# Altium PCB PCB2.PcbDoc
Units mil, origin at the board's own origin, x right, y up, seen from the top; angles counter-clockwise.
Board outline 5780 x 3960 mil, 2 copper layers (Top Layer, Bottom Layer); 50 components, 61 nets, 281 pads, 48 vias.
Unrouted connection lines stored in the file: 8.
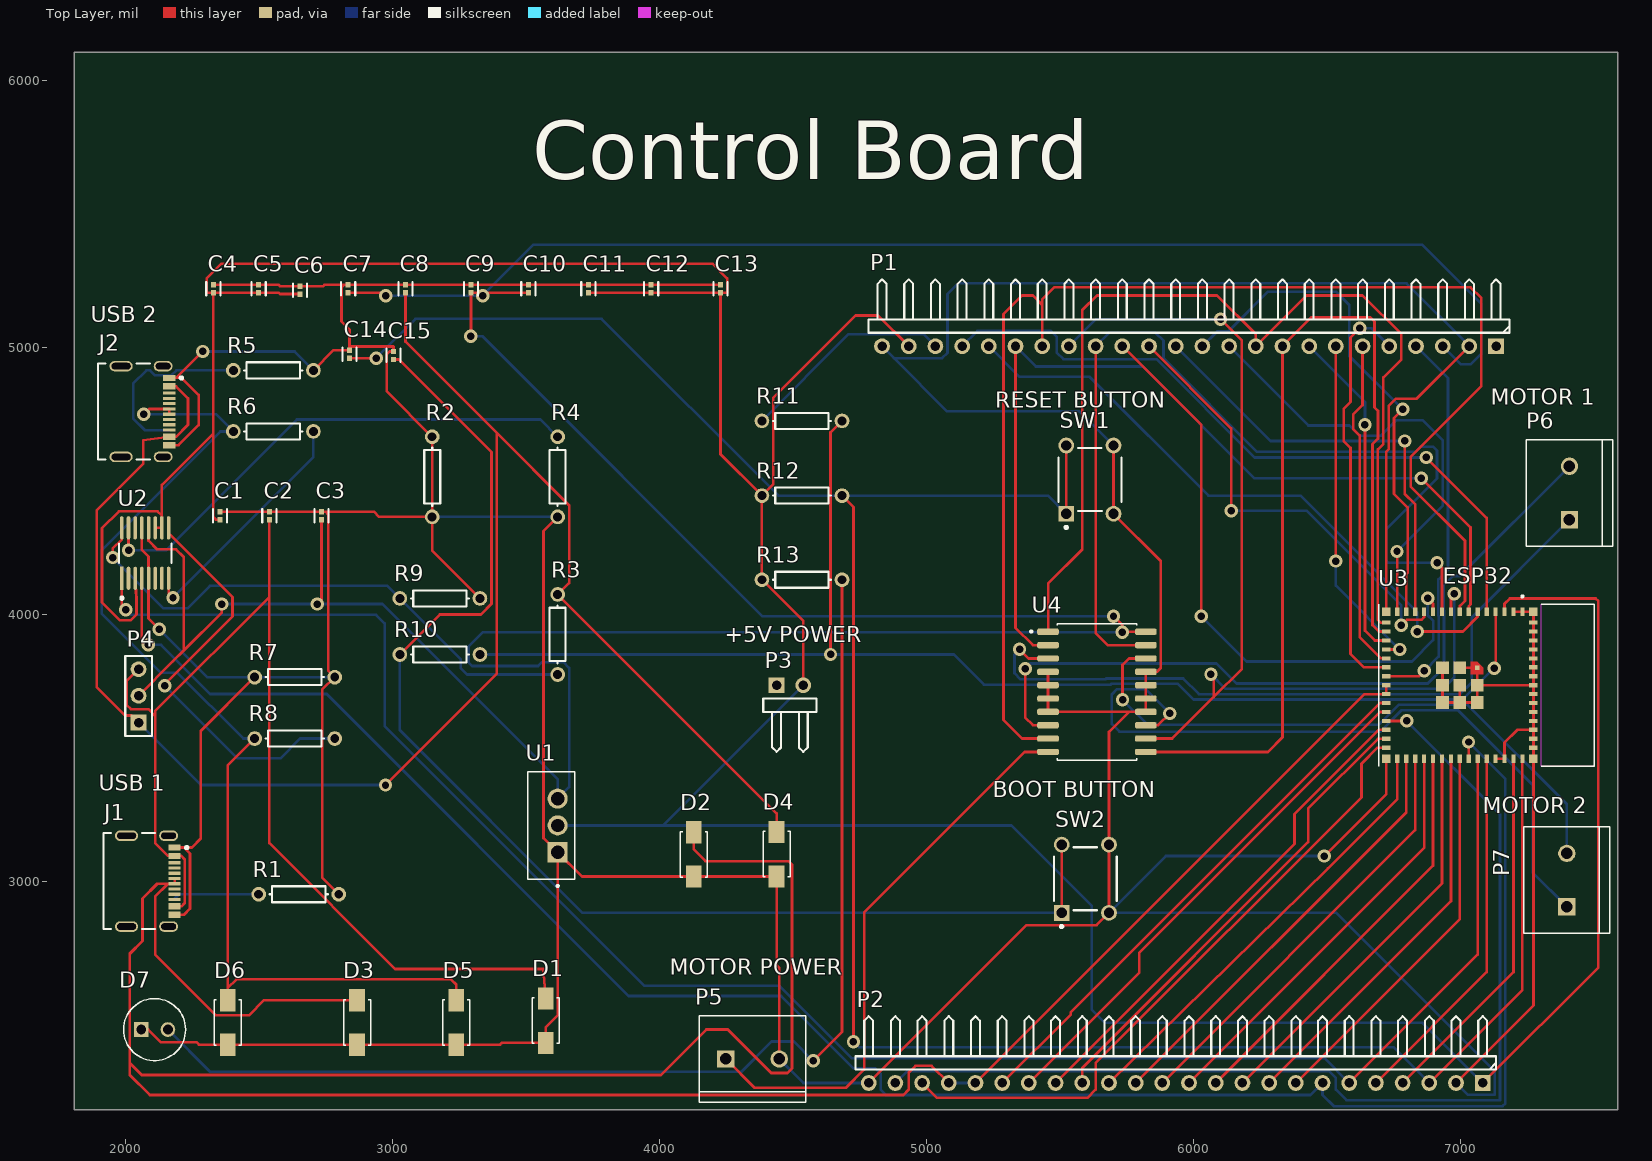
[diagram p0: Top Layer view]
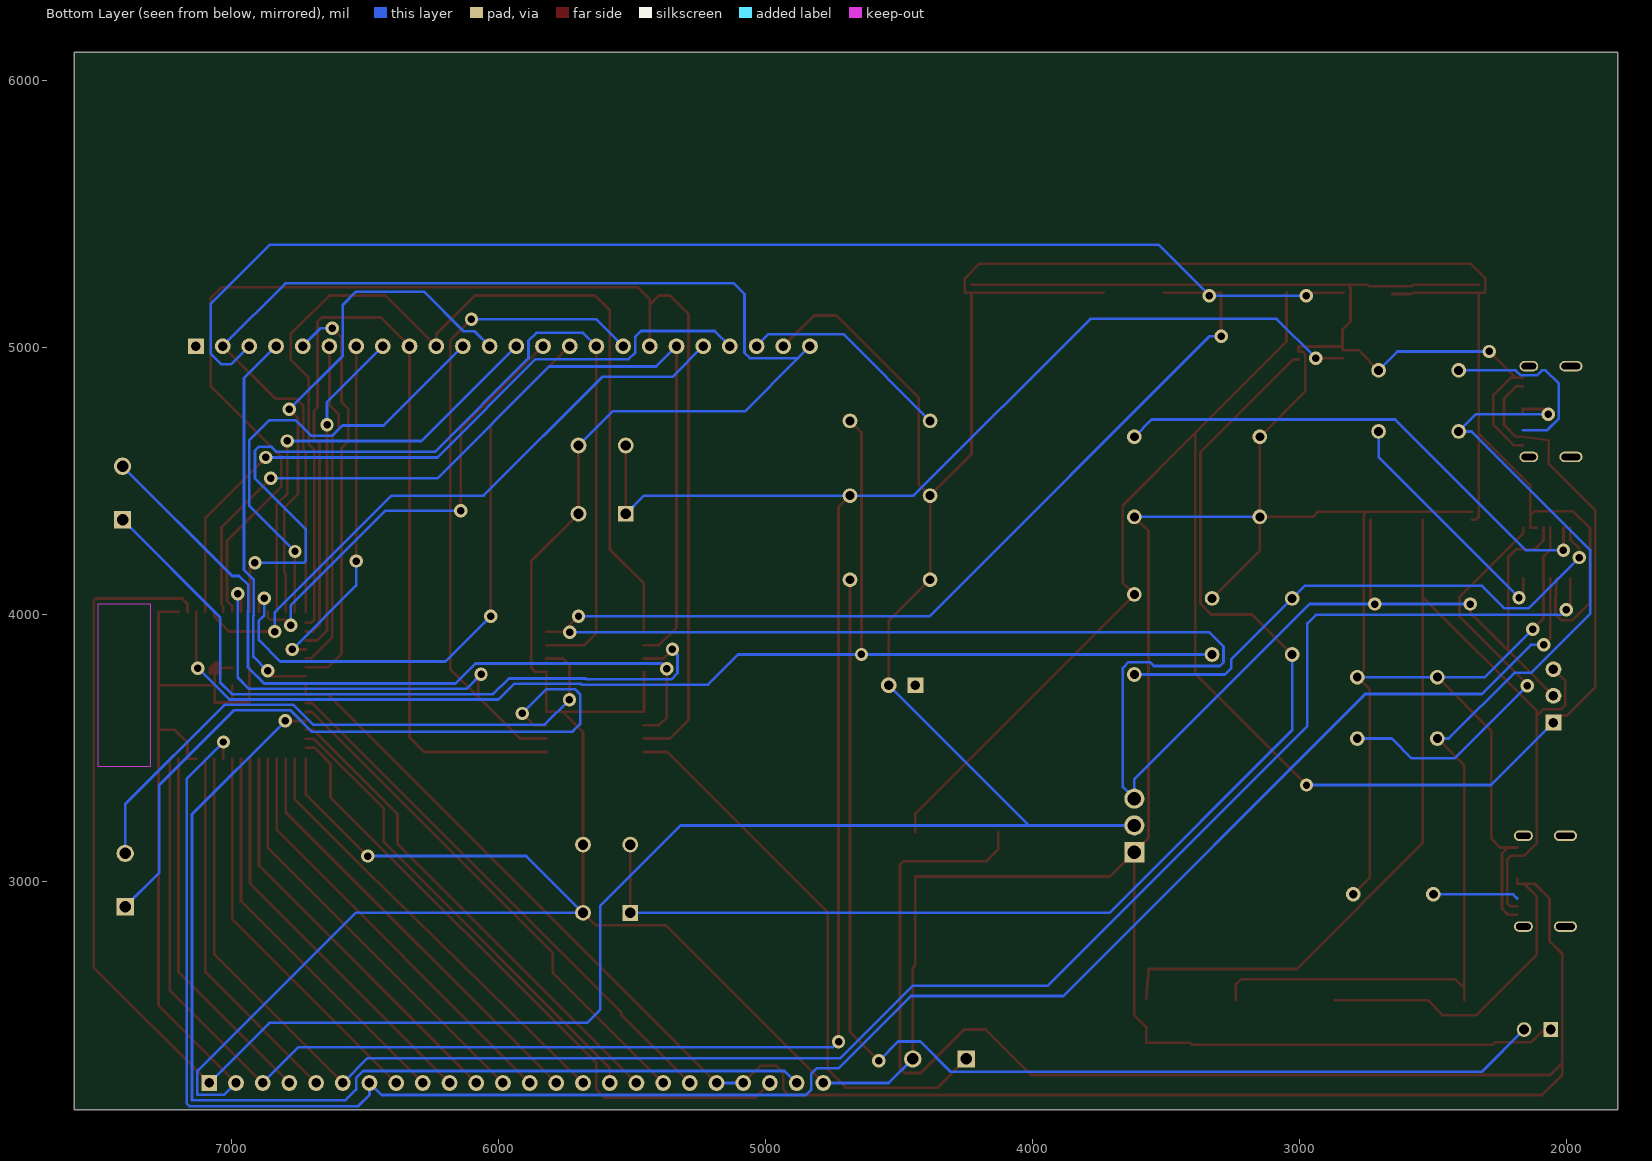
[diagram p1: Bottom Layer view, seen from below]
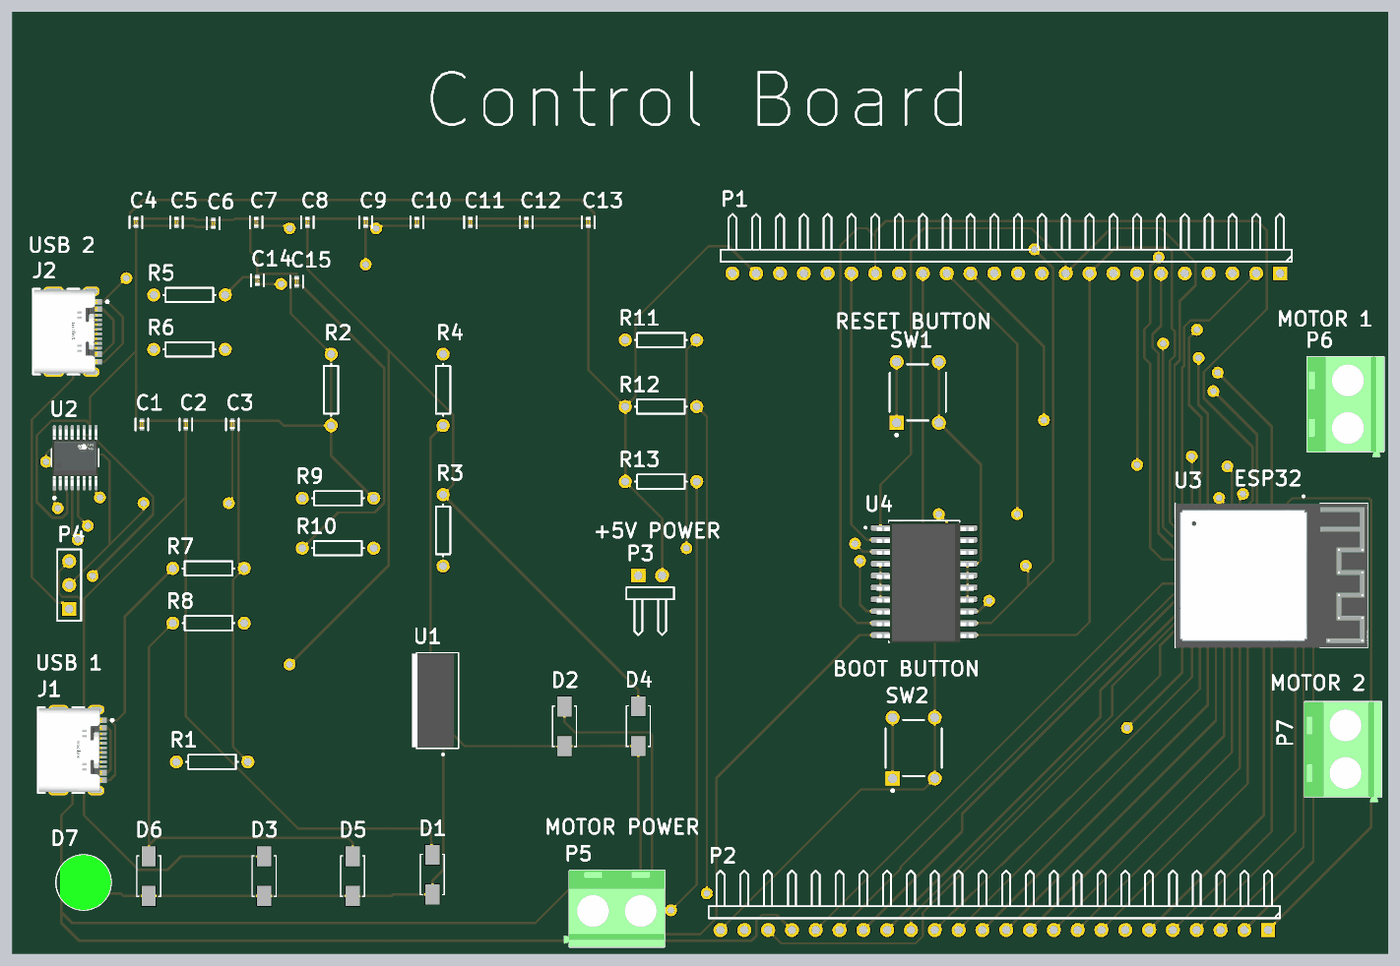
[diagram p2: 3D render of the assembled board from above, using the file's embedded part models]

## Layer stack, top to bottom
Top Solder: solder mask 0.4, Solder Resist, Dk 3.5
Top Layer: signal copper 1.4
Dielectric 1: dielectric 12.6, FR-4, Dk 4.8
Bottom Layer: signal copper 1.4
Bottom Solder: solder mask 0.4, Solder Resist, Dk 3.5

## Board outline
1810,2145 7590,2145 7590,6105 1810,6105

## Design rules (kind name [scope] priority, off if disabled: settings)
Clearance [All] p1: gap=10 ignorepadtopadclearanceinfootprint=FALSE
PolygonConnect [All] p1: connectstyle=Relief reliefconductorwidth=10 reliefentries=4 polygonreliefangle="90 Angle" airgapwidth=10
RoutingVias [All] p1: holewidth=28 width=50 viastyle="Through Hole" minholewidth=28 minwidth=50 maxholewidth=28 maxwidth=50
SolderMaskExpansion [All] p1: expansion=4 istentingtop=FALSE
Width [All] p1: maxlimit=10 minlimit=10 preferedwidth=10
30 further rules are at their usual default settings.

## Components (designator, comment, footprint, x,y, rotation, side; value= is the part's Value field where it differs from the comment)
C1 "10uf" FP-CL17-IPC_C 2355,4370 r90 top
C2 "100nf" FP-CL17-IPC_C 2540,4370 r90 top
C3 "10uf" FP-CL17-IPC_C 2735,4370 r90 top
C4 "10uf" FP-CL17-IPC_C 2330,5220 r90 top
C5 "10uf" FP-CL17-IPC_C 2500,5220 r90 top
C6 "10uf" FP-CL17-IPC_C 2655,5215 r90 top
C7 "10uf" FP-CL17-IPC_C 2835,5220 r90 top
C8 "100nf" FP-CL17-IPC_C 3050,5220 r90 top
C9 "100nf" FP-CL17-IPC_C 3295,5220 r90 top
C10 "4.7uf" FP-CL17-IPC_C 3510,5220 r90 top
C11 "4.7uf" FP-CL17-IPC_C 3735,5220 r90 top
C12 "10uf" FP-CL17-IPC_C 3970,5220 r90 top
C13 "100nf" FP-CL17-IPC_C 4230,5220 r90 top
C14 "1uf" FP-CL17-IPC_C 2840,4975.1 r90 top
C15 "100nf" FP-CL17-IPC_C 3005,4970 r90 top
D1 "SMAJ5.0CA" DIOM4325X250N 3575,2478.27 r90 top
D2 "SMAJ5.0CA" DIOM4325X250N 4130,3101.34 r90 top
D3 "SMAJ5.0CA" DIOM4325X250N 2868.58,2471.73 r90 top
D4 "SMAJ5.0CA" DIOM4325X250N 4440,3101.73 r90 top
D5 "SMAJ5.0CA" DIOM4325X250N 3240,2471.73 r90 top
D6 "SMAJ5.0CA" DIOM4325X250N 2383.82,2471.73 r90 top
D7 "L-53GD" LEDRD254W50D500H1060 2110,2445 r0 top
J1 "217179-0001" FP-2171790001-MFG 2050.3,3000.98 r270 top
J2 "217179-0001" FP-2171790001-MFG 2030,4760 r270 top
P1 "Header 24H" HDR1X24H 7135,5005 r180 top
P2 "Header 24H" HDR1X24H 7085,2245 r180 top
P3 "Header 2H" HDR1X2H 4440,3735 r0 top
P4 "Header 3" HDR1X3 2050,3595 r90 top
P5 "282837-2" TE_282837-2 4350,2335 r0 top
P6 "282837-2" TE_282837-2 7410,4455 r90 top
P7 "282837-2" TE_282837-2 7400,3005 r90 top
R1 "Res1" AXIAL-0.3 2650,2951.77 r180 top value=5k
R2 "Res1" AXIAL-0.3 3150,4515.51 r90 top value=5k
R3 "Res1" AXIAL-0.3 3620,3925 r90 top value=4k7
R4 "Res1" AXIAL-0.3 3620,4515.51 r90 top value=10k
R5 "Res1" AXIAL-0.3 2555,4914.49 r180 top value=5k
R6 "Res1" AXIAL-0.3 2555,4685.51 r0 top value=27R
R7 "Res1" AXIAL-0.3 2635,3765 r180 top value=5k
R8 "Res1" AXIAL-0.3 2635,3535 r180 top value=27R
R9 "Res1" AXIAL-0.3 3178.82,4060 r180 top value=10k
R10 "Res1" AXIAL-0.3 3178.82,3850 r180 top value=27R
R11 "Res1" AXIAL-0.3 4535,4725 r180 top value=27R
R12 "Res1" AXIAL-0.3 4535,4445 r180 top value=10K
R13 "Res1" AXIAL-0.3 4535,4130 r180 top value=10K
SW1 "1825910-6" TECO-1825910-6_V 5613.58,4505 r90 top
SW2 "1825910-6" TECO-1825910-6_V 5596.42,3010 r90 top
U1 "LD1117V33" TO255P1020X450X1968-3 3596.18,3209.61 r90 top
U2 "FT230XS-R" FP-SSOP-16-MFG 2075,4230 r90 top
U3 "ESP32-S3-MINI-1U-N8" XCVR_ESP32-S3-MINI-1-N8 6999.41,3735 r270 top
U4 "L293DD" SOIC127P1032X265-20N 5640,3710 r0 top

## Footprints (in the part's own frame and the unit in brackets; to place one, negate y for a bottom-side part, rotate by r counter-clockwise, add the part's x,y. Pads: shape width x height; smd on the part's side, far side on the other; paste and mask are expansions set on the pad)
AXIAL-0.3 [mm] "Axial Device, Thru-Hole; 2 Leads; 0.3 in Pin Spacing"
  round 1.4 hole 0.85: 1(-3.81,0) 2(3.81,0)
  silkscreen extent -2.77,-0.76 2.77,0.76
DIOM4325X250N [mm]
  rect 2.12x1.5 smd: 1(-2.115,0) 2(2.115,0)
  silkscreen extent -2.16,-1.28 2.17,1.28
FP-2171790001-MFG [mm]
  rrect100% 1x1.8 hole 1.4 slot 0.6 at 0 deg paste-2539.97 mask+0: 1(-4.32,2.85) 2(4.32,2.85)
  rrect100% 1x2.2 hole 1.8 slot 0.6 at 0 deg paste-2539.97 mask+0: 3(-4.32,-1.15) 4(4.32,-1.15)
  rect 0.6x1.15 smd paste+0 mask+0: A1-B12(-3.2,3.425) A4-B9(-2.4,3.425) B1-A12(3.2,3.425) B4-A9(2.4,3.425)
  rect 0.3x1.15 smd paste+0 mask+0: A5(-1.25,3.425) A6(-0.25,3.425) A7(0.25,3.425) A8(1.25,3.425) B5(1.75,3.425) B6(0.75,3.425) B7(-0.75,3.425) B8(-1.75,3.425)
  silkscreen extent -4.57,-3.35 4.57,4.7, body extent -4.92,-3.45 4.92,4.1, height 0.25
FP-CL17-IPC_C [mil]
  rect 20.29x18.6 smd paste+0 mask+0: 1(-14.9,0) 2(14.9,0)
  silkscreen extent -25,-27 25,27, body extent -29,-15 29,15, height 10
FP-SSOP-16-MFG [mm]
  rect 2.2x0.345 smd paste+0 mask+0: 1(-2.4,2.222)
  rrect100% 2.2x0.345 smd paste+0 mask+0: 2(-2.4,1.587) 3(-2.4,0.952) 4(-2.4,0.317) 5(-2.4,-0.318) 6(-2.4,-0.953) 7(-2.4,-1.588) 8(-2.4,-2.222) 9(2.4,-2.222) 10(2.4,-1.587) 11(2.4,-0.952) 12(2.4,-0.317) 13(2.4,0.318) 14(2.4,0.953) 15(2.4,1.588) 16(2.4,2.222)
  silkscreen extent -4.42,-2.5 0.93,2.5, body extent -3.6,-2.75 3.6,2.75, height 0.25
HDR1X2H [mm] "Connector; Header; 2 Position; Right Angle"
  rect 1.5x1.5 hole 0.9: 1(0,0)
  round 1.5 hole 0.9: 2(2.54,0)
  silkscreen extent -1.27,-6.35 3.81,-1.27
HDR1X3 [mm] "Connector; Header; 3 Position"
  rect 1.5x1.5 hole 0.9: 1(0,0)
  round 1.5 hole 0.9: 2(2.54,0) 3(5.08,0)
  silkscreen extent -1.27,-1.27 6.35,1.27
HDR1X24H [mm] "Connector; Header; 24 Position; Right Angle"
  rect 1.5x1.5 hole 0.9: 1(0,0)
  round 1.5 hole 0.9: 2(2.54,0) 3(5.08,0) 4(7.62,0) 5(10.16,0) 6(12.7,0) 7(15.24,0) 8(17.78,0) 9(20.32,0) 10(22.86,0) 11(25.4,0) 12(27.94,0) 13(30.48,0) 14(33.02,0) 15(35.56,0) 16(38.1,0) 17(40.64,0) 18(43.18,0) 19(45.72,0) 20(48.26,0) 21(50.8,0) 22(53.34,0) 23(55.88,0) 24(58.42,0)
  silkscreen extent -1.27,-6.35 59.69,-1.27
LEDRD254W50D500H1060 [mm]
  round 1.4 hole 0.93: A(1.27,0)
  rect 1.4x1.4 / inner round 1.4 / far side rect 1.4x1.4 hole 0.93: C(-1.27,0)
  silkscreen extent -2.95,-2.95 2.95,2.95, body extent -2.5,-2.95 2.95,2.95, height 9.6
SOIC127P1032X265-20N [mm]
  rrect50% 2.05x0.6 smd: 1(-4.655,5.715) 2(-4.655,4.445) 3(-4.655,3.175) 4(-4.655,1.905) 5(-4.655,0.635) 6(-4.655,-0.635) 7(-4.655,-1.905) 8(-4.655,-3.175) 9(-4.655,-4.445) 10(-4.655,-5.715) 11(4.655,-5.715) 12(4.655,-4.445) 13(4.655,-3.175) 14(4.655,-1.905) 15(4.655,-0.635) 16(4.655,0.635) 17(4.655,1.905) 18(4.655,3.175) 19(4.655,4.445) 20(4.655,5.715)
  silkscreen extent -6.35,-6.5 3.8,6.5, body extent -5.04,-6.53 5.29,6.27, height 2.65
TE_282837-2 [mm]
  rect 1.65x1.65 / inner round 1.65 / far side rect 1.65x1.65 hole 1.1: 1(-2.54,0)
  round 1.65 hole 1.1: 2(2.54,0)
  silkscreen extent -5.08,-4.1 5.08,4.1, body extent -5.68,-4.1 5.08,4.1, height 10
TECO-1825910-6_V [mm] "Switch, 4-Leads, Body 5.99x5.99mm"
  rect 1.5x1.5 hole 0.99: 1(-3.25,2.25)
  round 1.5 hole 0.99: 2(3.25,2.25) 3(-3.25,-2.25) 4(3.25,-2.25)
  silkscreen extent -4.67,-2.99 3,2.99, body extent -3,-2.99 2.99,3, height 5
TO255P1020X450X1968-3 [mm]
  rect 1.91x1.91 / inner round 1.91 / far side rect 1.91x1.91 hole 1.27: 1(-2.55,-0.605)
  round 1.91 hole 1.27: 2(0,-0.605) 3(2.55,-0.605)
  silkscreen extent -5.85,-2.25 5.1,2.25, body extent -4.98,-1.76 4.98,2.69, height 19.68
XCVR_ESP32-S3-MINI-1-N8 [mm]
  rect 0.8x0.4 smd: 1(-7,5.95) 2(-7,5.1) 3(-7,4.25) 4(-7,3.4) 5(-7,2.55) 6(-7,1.7) 7(-7,0.85) 8(-7,0) 9(-7,-0.85) 10(-7,-1.7) 11(-7,-2.55) 12(-7,-3.4) 13(-7,-4.25) 14(-7,-5.1) 15(-7,-5.95) 31(7,-5.95) 32(7,-5.1) 33(7,-4.25) 34(7,-3.4) 35(7,-2.55) 36(7,-1.7) 37(7,-0.85) 38(7,0) 39(7,0.85) 40(7,1.7) 41(7,2.55) 42(7,3.4) 43(7,4.25) 44(7,5.1) 45(7,5.95)
  rect 0.4x0.8 smd: 16(-5.95,-7) 17(-5.1,-7) 18(-4.25,-7) 19(-3.4,-7) 20(-2.55,-7) 21(-1.7,-7) 22(-0.85,-7) 23(0,-7) 24(0.85,-7) 25(1.7,-7) 26(2.55,-7) 27(3.4,-7) 28(4.25,-7) 29(5.1,-7) 30(5.95,-7) 46(5.95,7) 47(5.1,7) 48(4.25,7) 49(3.4,7) 50(2.55,7) 51(1.7,7) 52(0.85,7) 53(0,7) 54(-0.85,7) 55(-1.7,7) 56(-2.55,7) 57(-3.4,7) 58(-4.25,7) 59(-5.1,7) 60(-5.95,7)
  rect 1.2x1.2 smd: 61(0,0) 67(0,1.65) 68(1.65,1.65) 69(-1.65,0) 70(1.65,0) 71(-1.65,-1.65) 72(0,-1.65) 73(1.65,-1.65)
  rect 0.8x0.8 smd: 62(-7,7) 63(-7,-7) 64(7,-7) 65(7,7)
  rect 0.4x0.4 smd paste-1 mask+0: 66(-1.65,1.65)
  Top Layer region: -1.05,1.05 -2.25,1.05 -2.25,1.65 -1.65,2.25 -1.05,2.25
  Keep-Out Layer region: 7.7,7.725 -7.7,7.725 -7.7,12.775 7.7,12.775
  Keep-Out Layer region: 7.7,7.725 -7.7,7.725 -7.7,12.775 7.7,12.775
  silkscreen extent -8.55,-7.72 7.7,12.77, body extent -7.7,-7.73 7.7,12.78, height 2.55

## Part data
C1 C2 C3 C4 C5 C6 C7 C8 C9 C10 C11 C12 C13 C14 C15: library part CMP-13271-001069-1, "Cap Ceramic 100nF 10V X7R ±10% SMD 0402 +125°C Paper T/R", Capacitance=100nF, Case Code (Imperial)=0402, Case Code (Metric)=1005, Dielectric=X7R, Max Operating Temperature=125°C, Min Operating Temperature=-55°C, Package Quantity=1, Tolerance=10%, Voltage Rating=10V, Case/Package=0402, Contact Plating=Tin, Depth=0.5mm, Height=0.5mm, Length=1mm, Mount="Surface Mount", Packaging="Tape and Reel", Radiation Hardening=No, Thickness=0.022inch, Width=0.02inch
D1 D2 D3 D4 D5 D6: Package=None, Availability=Unavailable, MP=SMAJ5.0CA, Price=None
D7: "LED 5mm Green 568nm 20mcd/10mA 60Â°", Package=CDIP-28, Availability=Unavailable, Check_prices=https://www.snapeda.com/parts/L-53GD/Kingbright/view-part/?ref=eda, MF=Kingbright, MP=L-53GD, Price=None, SnapEDA_Link=https://www.snapeda.com/parts/L-53GD/Kingbright/view-part/?ref=snap
J1 J2: library part CMP-04767-000028-2, "CONN RCP USB2.0 TYP C 24P SMD RA", Current Rating=1.25A, Max Operating Temperature=85°C, Min Operating Temperature=-40°C, Voltage Rating=30V, Contact Material="Gold, Nickel", Gender=Receptacle, Height=3.36mm, NexarPartId=117190526, Number of Contacts=16, USB Standard="USB 2.0"
P1 P2: "Header, 24-Pin, Right Angle", LatestRevisionDate=17-Jul-2002, LatestRevisionNote="Re-released for DXP Platform.", Publisher="Altium Limited"
P3: "Header, 2-Pin, Right Angle", LatestRevisionDate=17-Jul-2002, LatestRevisionNote="Re-released for DXP Platform.", Publisher="Altium Limited"
P4: "Header, 3-Pin", LatestRevisionDate=17-Jul-2002, LatestRevisionNote="Re-released for DXP Platform.", Publisher="Altium Limited"
P5 P6 P7: "Ð Ð°Ð·ÑŠÐµÐ¼Ð½Ñ‹Ðµ ÐºÐ»ÐµÐ¼Ð¼Ð½Ñ‹Ðµ ÐºÐ¾Ð»Ð¾Ð´ÐºÐ¸ Ð Ð¾Ð·ÐµÑ‚ÐºÐ° 2 Ð¿Ð¾Ð»Ð¾Ð¶ÐµÐ½Ð¸Ñ 5,08 Ð¼Ð¼ ÐŸÑ€Ð¸Ð¿Ð¾Ð¹ Ð¿Ñ€ÑÐ¼Ð¾Ð¹ Ñ‡ÐµÑ€ÐµÐ· Ð¾Ñ‚Ð²ÐµÑ€ÑÑ‚Ð¸Ðµ 13,5 Ð / ÐºÐ¾Ð½Ñ‚Ð°ÐºÑ‚", Package=None, Availability="In Stock", Check_prices=https://www.snapeda.com/parts/282837-2/TE+Connectivity+AMP+Connectors/view-part/?ref=eda, MF="TE Connectivity", MP=282837-2, Price=None, Purchase-URL=https://pricing.snapeda.com/search/part/282837-2/?ref=eda, SnapEDA_Link=https://www.snapeda.com/parts/282837-2/TE+Connectivity+AMP+Connectors/view-part/?ref=snap
R1 R2 R3 R4 R5 R6 R7 R8 R9 R10 R11 R12 R13: "Resistor", LatestRevisionDate=17-Jul-2002, LatestRevisionNote="Re-released for DXP Platform.", PackageDescription="Axial Device, Thru-Hole; 2 Leads; 0.3 in Pin Spacing", PackageReference=AXIAL-0.3, Published=8-Jun-2000, Publisher="Altium Limited"
SW1 SW2: library part CMP-1684-00021-1, "Tact Switch, SPST-NO, 0.05 A, -35 to 85 degC, 4-Pin THD, RoHS, Bulk", Actuator Color=Black, Contact Rating @ Voltage=0.05A@24VDC, Dielectric Strength=500VAC, Manufacturer="TE Connectivity", Maximum AC Voltage Rating=N/A, Maximum Contact Resistance=100mOhm, Maximum DC Voltage Rating=24V, Minimum Insulation Resistance=100MOhm, Operating Temperature=-35to85C, Package Description="4-Pin Through Hole Device, Body 5.99 x 5.99 mm, Pitch 6.5 mm", Package Reference=THD, Actuator Length=1.4mm, Actuator Material=PolybutyleneTerephthalate, Actuator Style=RoundButton, Base Material=N/A, Body Orientation=Straight, Bushing Type=Unthreaded, Contact Material=CopperAlloy, Contact Plating=Silver, Datasheet URL=http://www.te.com/commerce/DocumentDelivery/DDEController?Action=showdoc&DocId=Customer+Drawing%7F1825910%7FC9%7Fpdf%7FEnglish%7FENG_CD_1825910_C9.pdf%7F1825910-6, Datasheet Version="Rev. C9", Dimension=5.99x5mm, Electrical Life=100000Cycles, Family=1825910, Function=MomentaryContact, Housing Material=N/A, Illumination=N/R, Manufacturer URL=http://www.te.com, Mechanical Life=100000Cycles, Mounting=ThroughHole, Packaging=N/A, Part No=1825910-6, Pole Throw Configuration=SPST, Product Weight=N/A, RoHS=Yes, Seal Description=N/A, Seal Location=N/A, Switch Configuration=OFF(ON), Terminal Type=PCPins, Thread Size=N/R
U1: "Linear Voltage Regulator IC Positive Fixed 1 Output 800mA TO-220AB", Package="TO-220-3 ON Semiconductor", Availability="In Stock", Check_prices=https://www.snapeda.com/parts/LD1117V33/STMicroelectronics/view-part/?ref=eda, MF=STMicroelectronics, MP=LD1117V33, Price=None, Purchase-URL=https://pricing.snapeda.com/search/part/LD1117V33/?ref=eda, SnapEDA_Link=https://www.snapeda.com/parts/LD1117V33/STMicroelectronics/view-part/?ref=snap
U2: library part CMP-0248-00026-3, "IC USB SERIAL BASIC UART 16SSOP", Case/Package=SSOP, Max Operating Temperature=85°C, Max Supply Voltage=5.5V, Min Operating Temperature=-40°C, Min Supply Voltage=2.97V, Operating Supply Current=8mA, Operating Supply Voltage=5V, Package Quantity=3000, Data Rate=12Mbps, Height=0.059inch, Interface=UART, Length=5mm, Mount="Surface Mount", Number of Channels=1, Number of Pins=16, Packaging="Tape and Reel", Weight=0.004586oz, Width=0.157inch
U3: Manufacturer="Espressif Systems", Supplier Part Number=1965-ESP32-S3-MINI-1U-N8CT-ND, Category=LDO, Manufacturer Part Number=ESP32-S3-MINI-1U-N8, Pricing="1=3.1 (USD)", RoHS=No, Stock=2332, Supplier=Digikey
U4: "Bipolar Motor Driver Parallel 20-SOIC", Package="SOIC-20 STMicroelectronics", Availability=Unavailable, MF=STMicroelectronics, MP=L293DD, Price=None, SnapEDA_Link=https://www.snapeda.com/parts/L293DD/STMicroelectronics/view-part/585585/?ref=snap

## Via types
v1: diameter 50, hole 28, Top Layer to Bottom Layer, 48 vias

## Nets (pads, with @x,y where several pads share a name; then routed paths per layer and width w, separated by ;. In a path a pad name is that pad's centre, name@x,y a point inside that pad or via, vN(x,y) a via of type N, cw(c..) or ccw(c..) an arc to the next point about the centre after c; other vN are vias at no path point)
+3V3_FTDI: C1.1 C4.1 C5.1 C6.1 C11.1 C12.1 C13.1 P1.23 P2.1 P3.2 R12.2 R13.2 U1.2 U2.3 U2.10 U2.11 U3.3 | length 15017.5
  Top Layer w10: U2.3 2042,4057.5 2042,4000 2020,3978 1980,3978 1913,4045 1913,4323 1976,4386 2121.5,4386 2137.5,4370 ; U2.11 U2.10 2137.5,4370 ; C1.1 2340,4355.1 2330,4365.1 2330,4677.5 ; C6.1 2580,5200.1 2575,5205.1 C5.1 C4.1 ; C11.1 C12.1 C13.1 ; P3.2 4540,3975 R13.2 R12.2 ; P1.23 4820,5120 4736,5120 4428,4812 4428,4488 R12.2 ; P2.1 7518,2678 7518,4050 7508,4060 7186.73,4060 7166.73,4040 U3.3 ; 2137.5,4370 2137.5,4485 2330,4677.5 ; 2330,4677.5 C4.1 ; C4.1 2305,5205.1 2305,5259 2360,5314 4200,5314 4255,5259 4255,5205.1 C13.1 ; C13.1 4230,4600 R12.2
  Bottom Layer w10: U1.2 4014.61,3209.61 ; P3.2 4014.61,3209.61 ; P2.1 6860,2470 5670,2470 5620,2520 5620,2909 5319.39,3209.61 4014.61,3209.61
+3V3_REG: P3.1
+5V_BUS1: C8.1 D4.2 J2.A4-B9 J2.B4-A9 P4.1 R3.2 | length 6729.3
  Top Layer w10: P4.1 2023.72,3621.28 2000,3621.28 1893,3728.28 1893,4390 2067,4564 2067,4653 J2.B4-A9 2190,4665.51 2235,4710.51 2235,4809.49 2190,4854.49 J2.A4-B9 ; v1(2975,3361) 3392,3778 3392,4680 ; C8.1 3050,5022 3392,4680 ; D4.2 4440,3255 R3.2 3663,4118 3663,4409 3392,4680
  Bottom Layer w10: P4.1 2284,3361 v1(2975,3361)
+5V_BUS2: C2.1 D1.2 J1.A4-B9 J1.B4-A9 P4.3 | length 4262
  Top Layer w10: P4.3 2005.47,3750.47 2005.47,3661.53 2022,3645 2087,3645 2112,3620 ; J1.B4-A9 2210,2906.5 2223,2919.5 2223,3082.47 2210,3095.47 J1.A4-B9 2160,3095.47 2112,3143.47 2112,3620 ; C2.1 2540,4066 ; D1.2 3566,2672 3011,2672 2540,3143 2540,4066 ; 2112,3620 2112,3638 2540,4066
+12: P5.1 U4.10 | length 2117.6
  Top Layer w10: P5.1 4358,2227 4700,2227 4768,2295 4768,2884 5369,3485 U4.10
"+VCC FTDI": C3.1 C7.1 C9.1 C10.1 P1.3 P4.2 U1.3 U2.12 U4.20 | length 14670.9
  Top Layer w10: P4.2 2179.75,3824.75 2219.29,3864.29 ; U2.12 2087.5,4276.5 2120,4244 2191,4244 2219.29,4215.71 2219.29,3864.29 ; v1(2362,4039) 2362,4007 2219.29,3864.29 ; v1(2720,4039) 2735,4054 C3.1 ; C7.1 2964.9,5205.1 v1(2976,5194) ; v1(3295,5042) C9.1 v1@3327.9,5205.1 ; v1(3339,5194) v1@3327.9,5205.1 ; C10.1 v1@3327.9,5205.1 ; v1(5702,3993) 5735,3960 5735,3935 v1@5736,3934 ; v1(5735,3933) v1@5736,3934 ; v1@5736,3934 5737,3935 U4.20 v1@5736,3934
  Bottom Layer w10: v1(2362,4039) v1(2720,4039) 2964,4039 3620,3383 U1.3 3663,3353 3663,3800 3642,3821 3561,3821 3547,3807 3299,3807 3286,3820 3286,3880 3339,3933 v1(5735,3933) ; v1(2976,5194) v1(3339,5194) 3530,5385 6857,5385 7080,5162 7080,4977 7040,4937 7003,4937 P1.3 ; v1(3295,5042) 3339,5042 4388,3993 v1(5702,3993)
"BTN GPIO0": C15.1 R10.2 SW2.1 SW2.2 | length 4802.8
  Top Layer w10: C15.1 3024.9,4955.1 3372,4608 3372,4040 3332,4000 3178.82,4000 R10.2 ; SW2.1 SW2.2
  Bottom Layer w10: R10.2 3028.82,3566.18 3712.95,2882.05 SW2.1
CHIP_PU: C14.1 P2.3 R12.1 SW1.1 SW1.2 U3.45 | length 8947.5
  Top Layer w10: C14.1 v1(2940,4960.19) ; R12.1 4728,4402 v1(4728,2399) ; SW1.1 SW1.2 ; P2.3 7233.66,2593.66 U3.45
  Bottom Layer w10: v1(2940,4960.19) 3086.81,5107 3785,5107 4447,4445 R12.1 5457.05,4445 SW1.1 ; v1(4728,2399) 4748,2379 6751,2379 P2.3
CON1_USB_N: D5.2 D6.2 J2.A6 J2.A7 J2.B6 J2.B7 R6.1 R8.2 | length 4124.3
  Top Layer w10: v1(2070,4750) 2089.84,4769.84 J2.A6 J2.A7 ; D6.2 2383.82,2600 ; R8.2 2383.82,3433.82 2383.82,2600 ; D5.2 3240,2613 3220,2633 2416.82,2633 2383.82,2600
  Bottom Layer w10: v1(2070,4750) 2340.51,4750 R6.1 2356.09,4685.51 1912.5,4241.92 1912.5,4002.5 2133.94,3781.06 2196.71,3781.06 2442.77,3535 R8.2
CON2_USB_N: D2.2 D3.2 J1.A6 J1.A7 J1.B6 J1.B7 P2.20 P2.21 U3.23 U3.24 | length 11351.3
  Top Layer w10: J1.A6 J1.A7 2160,2991.14 ; D3.2 2520,2555 2463,2498 2340,2498 2112,2726 2112,2943.14 2160,2991.14 ; D2.2 4130,3120 4174,3076 4485,3076 4498,3063 4498,2300 4480,2282 4420,2282 4257,2445 4177,2445 4007,2275 2062,2275 2017,2320 ; P2.21 5021,2309 4960,2309 4935,2284 4935,2220 4915,2200 2092,2200 2017,2275 2017,2320 ; P2.20 6641.54,3701.54 U3.24 U3.23 ; 2017,2320 2017,2729 2065,2777 2065,2936.14 2120,2991.14 2160,2991.14
  Bottom Layer w10: P2.21 P2.20
"CON GPIO0": P1.22 R11.2 | length 803.3
  Bottom Layer w10: R11.2 4710,5050 4990,5050 P1.22
FTD1_USB_N: R8.1 U2.9 | length 1576.2
  Top Layer w10: v1(2148,3733) 2148,3738 2402,3992 2402,4065.5 2162.5,4305 U2.9
  Bottom Layer w10: v1(2148,3733) 2420,3461 2581,3461 2655,3535 R8.1
FTD1_USB_P: R6.2 U2.8 | length 919.7
  Top Layer w10: U2.8 2162.5,4079.5 v1(2179,4063)
  Bottom Layer w10: v1(2179,4063) 2705,4589 R6.2
GND: C1.2 C2.2 C3.2 C4.2 C5.2 C6.2 C7.2 C8.2 C9.2 C10.2 C11.2 C12.2 C13.2 C14.2 C15.2 D1.1 D2.1 D3.1 D4.1 D5.1 D6.1 D7.C J1.A1-B12 J1.A5 J1.B1-A12 J2.A1-B12 J2.A5 J2.B1-A12 P1.2 P1.24 P2.2 P2.24 P5.2 R1.1 R2.1 R2.2 R4.1 R5.1 R7.1 R7.2 R9.1 SW1.3 SW1.4 SW2.3 SW2.4 U1.1 U2.5 U2.13 U3.1 U3.2 U3.42 U3.43 U3.46 U3.47 U3.48 U3.49 U3.50 U3.51 U3.52 U3.53 U3.54 U3.55 U3.56 U3.57 U3.58 U3.59 U3.60 U3.61 U3.62 U3.63 U3.64 U3.65 U3.66 U3.67 U3.68 U3.69 U3.70 U3.71 U3.72 U3.73 U4.4 U4.5 U4.6 U4.7 U4.14 U4.15 U4.16 U4.17 | length 29562.9
  Top Layer w10: D7.C 2086,2445 2133,2398 2266.46,2398 2276,2388.46 D6.1 D3.1 D5.1 3404,2388.46 3410.54,2395 D1.1 3575,2453 3620,2498 U1.1 ; U2.13 2062.5,4242 2087.5,4217 U2.5 2087.5,3984.5 v1(2128,3944) ; J2.B1-A12 2200,4634.02 2275,4709.02 2275,4822 2211.02,4885.98 2190.98,4885.98 ; J2.A1-B12 2190.98,4885.98 ; J1.B1-A12 2220,2875 2243,2898 2243,3103.97 2220,3126.97 ; J1.A1-B12 2220,3126.97 ; v1(2290,4985) 2190.98,4885.98 ; C4.2 C5.2 2575,5234.9 2580,5229.9 C6.2 2742,5229.9 2747,5234.9 2820,5234.9 ; C1.2 C2.2 C3.2 2750,4384.9 ; R7.2 2283,3563 2283,3159.97 2250,3126.97 2220,3126.97 ; R5.1 2780.51,4990 C14.2 2840,5003.97 ; R1.1 2738,3013.77 2738,3718 R7.1 2760,3790 2760,4374.9 2750,4384.9 ; R9.1 3150,4238.82 R2.1 ; R4.1 3567,4312.51 3567,3162.21 U1.1 ; C13.2 C12.2 C11.2 C10.2 C9.2 C8.2 C7.2 2820,5234.9 ; P5.2 4450,2676 4440,2686 D4.1 4284.39,3018.46 4284,3018.07 D2.1 3711.14,3018.07 U1.1 ; P2.24 5376,2836 5638.95,2836 SW2.3 SW2.4 5685,3560 5760,3635 ; U4.4 U4.5 U4.6 U4.7 5760,3635 ; SW1.4 SW1.3 5879,4200.21 5879,3800 5864,3785 U4.17 U4.16 U4.15 U4.14 5760,3635 ; v1(6492.11,3095) 6723.82,3326.71 U3.64 ; U3.63 6723.82,4609.51 6733,4618.7 6733,4781 6760,4808 6838,4808 P1.2 ; U3.71 U3.72 U3.73 U3.70 ; P2.2 7275,2535 U3.65 U3.46 U3.47 U3.48 ; U3.61 U3.70 ; U3.69 U3.66 U3.67 ; U3.42 U3.43 7166.73,3520 7214.41,3567.68 U3.48 ; U3.2 U3.1 U3.62 U3.60 U3.59 U3.58 U3.57 U3.56 U3.55 U3.54 U3.53 ; 2750,4384.9 2932,4384.9 2951.39,4365.51 R2.1 ; 2820,5234.9 2810,5224.9 2810,5097 2840,5067 2840,5003.97 ; 2840,5003.97 3005,5003.97 C15.2 2990,4984.9 2980,4974.9 2980,4835.51 R2.2 R2.1 ; U3.70 U3.68 U3.67 ; U3.67 U3.53 ; U3.48 U3.49 U3.50 U3.51 U3.52 U3.53
  Bottom Layer w10: v1(2128,3944) 2307,3765 R7.2 R7.1 ; v1(2290,4985) 2634.49,4985 R5.1 ; R2.1 R4.1 ; P5.2 4540,2245 P2.24 ; P1.24 4880,4960 ; SW1.4 5574.12,4761 5079,4761 4880,4960 ; v1(6492.11,3095) 5897.95,3095 SW2.3 6537.01,2882.05 7129.53,2289.53 7129.53,2200.47 7029.53,2200.47 P2.2 ; P1.2 6800,5240 5120,5240 5080,5200 5080,4980 5060,4960 4880,4960
GPIO0: R10.1 R11.1 U3.4 | length 5027
  Top Layer w10: v1(4642,3850) 4642,4682 R11.1 ; v1(7128,3799) 7133.27,3804.27 U3.4
  Bottom Layer w10: R10.1 v1(4642,3850) 5104,3850 5217,3737 5691.45,3737 5694.45,3740 5943,3740 6001.86,3681.14 7010.14,3681.14 v1(7128,3799)
GPIO1: P1.21 U3.5 | length 2664.4
  Top Layer w10: v1(6873,4588) 7099.8,4361.2 U3.5
  Bottom Layer w10: P1.21 5192,5062 5468,5062 5490,5040 5490,4980 5514,4956 5863,4956 6231,4588 v1(6873,4588)
GPIO2: P1.20 U3.6 | length 2358.5
  Top Layer w10: v1(6840,3936) 7011,3936 7066.34,3991.34 U3.6
  Bottom Layer w10: P1.20 5350,4890 5613,4890 6058,4445 6403,4445 6840,4008 v1(6840,3936)
GPIO3: P1.19 U3.7 U4.2 | length 3506.9
  Top Layer w10: P1.19 5335,3950 5400,3885 U4.2 ; v1(6855,4510) 7039,4326 7039,4037.13 7032.87,4031 U3.7
  Bottom Layer w10: P1.19 5411,4929 5812,4929 6231,4510 v1(6855,4510)
GPIO4: P1.18 U3.8 U4.9 | length 5136.2
  Top Layer w10: P1.18 5435,5160 ; U4.9 5360,3535 5290,3605 5290,5125 5360,5195 5400,5195 5435,5160 ; U3.8 6999.41,4031.41 7019,4051 7019,4276 6815,4480 6815,4590 7080,4855 7080,5185 7040,5225 5480,5225 5435,5180 5435,5160
GPIO5: P1.17 U3.9 U4.12 | length 3849.7
  Top Layer w10: U4.12 5922,3535 6077,3690 ; v1(6067,3776) 6077,3766 6077,3690 ; v1(6103,5106) 6183,5026 6183,3796 6077,3690 ; U3.9 6965.94,4064.89 v1(6979,4077.94)
  Bottom Layer w10: P1.17 5636,5106 v1(6103,5106) ; v1(6067,3776) 6121.86,3721.14 6935.47,3721.14 6979,3764.67 v1(6979,4077.94)
GPIO6: P1.16 U3.10 U4.19 | length 3694.9
  Top Layer w10: P1.16 5635,3930 5680,3885 U4.19 ; v1(6914,4194) 6932.48,4175.52 U3.10
  Bottom Layer w10: P1.16 5685,5055 5860,5055 5889,5026 5889,4960 6240,4609 6833,4609 6852,4628 6900,4628 6914,4614 6914,4510 6724,4320 6724,4200 6730,4194 v1(6914,4194)
GPIO7: P1.15 U3.11 | length 2330.7
  Top Layer w10: P1.15 6031,4709 v1(6031,3993) ; v1(6879,4061) 6899.02,4040.98 U3.11
  Bottom Layer w10: v1(6031,3993) 6200,3824 6820,3824 6899.5,3903.5 6899.5,3976.5 6879,3997 v1(6879,4061)
GPIO8: P1.14 U3.12 | length 1722
  Top Layer w10: P1.14 6143,4697 v1(6143,4388) ; v1(6780,3959) 6800.84,3979.84 6855,3979.84 6865.55,3990.39 U3.12
  Bottom Layer w10: v1(6143,4388) 6426,4388 6780,4034 v1(6780,3959)
GPIO9: P1.13 U3.13 | length 1660.5
  Top Layer w10: v1(6793,4649.74) 6793,4452 6832.09,4412.91 U3.13
  Bottom Layer w10: P1.13 6290.26,4649.74 v1(6793,4649.74)
GPIO10: P1.12 U3.14 | length 1924.5
  Top Layer w10: v1(6786,4768) 6753,4735 6753,4452 6804,4401 6804,4156 6798.62,4150.62 U3.14
  Bottom Layer w10: P1.12 6090.73,5060.73 6132.25,5060.73 6280.51,5209 6536,5209 6585,5160 6585,4969 v1(6786,4768)
GPIO11: P1.11 U3.15 | length 1707.8
  Top Layer w10: v1(6764,4236) 6765.16,4234.84 U3.15
  Bottom Layer w10: P1.11 6432,4708 6585.78,4708 6624.04,4669.74 6704.04,4669.74 6762.3,4728 6860,4728 6935,4653 6935,4407 v1(6764,4236)
GPIO12: P1.10 U3.16 U4.1 | length 3862.3
  Top Layer w10: U4.1 5457,3935 5457,4116 5585,4244 5585,5140 5640,5195 6089.49,5195 6235,5049.49 P1.10 6425,5195 6635,5195 6780,5050 6780,4954.75 6713,4887.75 6713,4638.7 6692,4617.7 6692,3980 6702.75,3969.25 U3.16
GPIO13: P1.9 U3.17 U4.11 | length 3608.7
  Top Layer w10: U4.11 6280,3485 6335,3540 P1.9 6442.51,5112.51 6665,5112.51 6680,5097.51 6680,4775.74 6693,4762.74 6693,4658.7 6672,4637.7 6672,3960 6696.21,3935.79 U3.17
GPIO14: P1.8 U3.18 | length 1247.4
  Top Layer w10: v1(6644,4710) 6644,3939.32 6681,3902.32 U3.18
  Bottom Layer w10: P1.8 6644,4796 v1(6644,4710)
GPIO15: P1.7 U3.19 | length 1285.3
  Top Layer w10: v1(6535,4200) P1.7 ; U3.19 v1(6774,3868.86)
  Bottom Layer w10: v1(6535,4200) 6535,4107.86 v1(6774,3868.86)
GPIO16: P1.6 U3.20 | length 1246.9
  Top Layer w10: P1.6 6635,4784 6600,4749 6600,4694 6624,4670 6624,3915.61 6704.21,3835.39 U3.20
GPIO17: P1.5 U3.21 | length 1548.4
  Top Layer w10: v1(6625,5072) 6590,5037 6590,4796 6564,4770 6564,4650 6590,4624 6590,3851.93 6640,3801.93 U3.21
  Bottom Layer w10: v1(6625,5072) 6668,5072 P1.5
GPIO18: P1.4 U3.22 | length 1454.7
  Top Layer w10: U3.22 6846.46,3768.46 v1(6866.46,3788.46)
  Bottom Layer w10: P1.4 6955,4885 6955,4166.74 6919,4130.74 6919,3996 6920,3995 6920,3842 v1(6866.46,3788.46)
GPIO21: P2.19 U3.25 | length 2033
  Top Layer w10: P2.19 5542,2502 5542,2510.07 6700,3668.07 U3.25
GPIO26: P2.18 U3.26 | length 1957.8
  Top Layer w10: P2.18 5799,2659 5799,2733 6700.61,3634.61 U3.26
GPIO33: P2.17 U3.28 | length 1852.6
  Top Layer w10: P2.17 6380.24,3140.24 6380.24,3252.75 6695.17,3567.68 U3.28
GPIO34: P2.16 U3.29 | length 1779
  Top Layer w10: P2.16 5585,2301.56 6431.17,3147.72 6431.17,3272.38 6693,3534.21 U3.29
GPIO35: P2.15 U3.31 | length 1666.8
  Top Layer w10: P2.15 6505,3048.26 6765.16,3308.42 U3.31
GPIO36: P2.14 U3.32 | length 1634.3
  Top Layer w10: P2.14 6798.62,3258.62 U3.32
GPIO37: P2.13 U3.33 | length 1606.7
  Top Layer w10: P2.13 6832.09,3192.09 U3.33
GPIO38: P2.12 U3.34 | length 1579.1
  Top Layer w10: P2.12 6865.55,3125.55 U3.34
GPIO39: P2.11 U3.35 | length 1551.6
  Top Layer w10: P2.11 6899.02,3059.02 U3.35
GPIO40: P2.10 U3.36 | length 1524
  Top Layer w10: P2.10 6932.48,2992.48 U3.36
GPIO41: P2.9 U3.37 | length 1496.5
  Top Layer w10: P2.9 6965.94,2925.94 U3.37
GPIO42: P2.8 U3.38 | length 1468.9
  Top Layer w10: P2.8 6999.41,2859.41 U3.38
GPIO45: P2.5 U3.41 | length 1386.2
  Top Layer w10: P2.5 7099.8,2659.8 U3.41
GPIO46: P2.4 U3.44 | length 1386.4
  Top Layer w10: P2.4 7200.2,2660.2 U3.44
GPIO47: P2.23 U3.27 | length 3995.9
  Top Layer w10: U3.27 v1(6799.86,3601.14)
  Bottom Layer w10: P2.23 4930,2290 6509,2290 6535,2264 6535,2220 6574.53,2180.47 7149.53,2180.47 7149.53,3251.47 v1(6799.86,3601.14)
GPIO48: P2.22 U3.30 | length 2437
  Top Layer w10: P2.22 5041,2189 5604,2189 5635,2220 5635,2319 6631,3315 6631,3440.75 6691,3500.75 U3.30
NetD7_A: D7.A R13.1 | length 4405.8
  Top Layer w10: v1(4577,2328) 4685,2436 R13.1
  Bottom Layer w10: D7.A 2318,2287 4308,2287 4421,2400 4505,2400 v1(4577,2328)
NetJ1_B5: J1.B5 R1.2 | length 321.9
  Bottom Layer w10: 2185,2935 2201.77,2951.77 R1.2
NetJ2_B5: J2.B5 R5.2 | length 695.9
  Bottom Layer w10: 2165,4690 2073.43,4690 2030,4733.43 2030,4865 2079.49,4914.49 2092.99,4914.49 2112.09,4895.39 2172.32,4895.39 2191.41,4914.49 R5.2
NetR4_2: R4.2 U2.15 | length 1920.3
  Top Layer w10: v1(2012.5,4241) U2.15
  Bottom Layer w10: v1(2012.5,4241) 2154,4241 2643,4730 3555.51,4730 R4.2
OUT_1_MOTOR: P6.1 U4.3 | length 2745.6
  Top Layer w10: v1(5350,3869) 5384,3835 U4.3
  Bottom Layer w10: v1(5350,3869) 5331,3850 5331,3780 5354,3757 5671.45,3757 5674.45,3760 5963,3760 6021.86,3701.14 7000.14,3701.14 7044,3745 7044,3989 P6.1
OUT_2_MOTOR: P6.2 U4.8 | length 2877.6
  Top Layer w10: v1(5371,3797) 5371,3614 5400,3585 U4.8
  Bottom Layer w10: v1(5371,3797) 5390,3816 6088,3816 6162.86,3741.14 6879.14,3741.14 6940,3802 6940,4014 6939,4015 6939,4110 6973,4144 6999,4144 P6.2
OUT_3_MOTOR: P7.1 U4.13 | length 2729
  Top Layer w10: U4.13 5869,3585 v1(5913,3629)
  Bottom Layer w10: v1(5913,3629) 5822,3720 5715,3720 5696,3701 5696,3589 5724,3561 6701.31,3561 6781.45,3641.14 6992.86,3641.14 7272,3362 7272,3033 P7.1
OUT_4_MOTOR: P7.2 U4.18 | length 2299.6
  Top Layer w10: v1(5736,3680) 5736,3811 5760,3835 U4.18
  Bottom Layer w10: v1(5736,3680) 5829,3587 6696,3587 6770.14,3661.14 7027.86,3661.14 7400,3289 P7.2
RTS_FTDI: U2.2
RXD_FTDI: P2.7 U2.4 U3.39 | length 7636.3
  Top Layer w10: U2.4 2062.5,3909.5 v1(2086,3886) ; v1(7032,3522.13) 7032.87,3521.25 U3.39
  Bottom Layer w10: v1(2086,3886) 2134,3886 2318,3702 2755,3702 3886,2571 4457,2571 4728,2300 4810,2300 4830,2280 4830,2220 4850,2200 6440,2200 P2.7 6485,2200 6527,2158 7160,2158 7170,2168 7170,3384.13 v1(7032,3522.13)
TXD_FTDI: P2.6 U2.1 U3.40 | length 7079.6
  Top Layer w10: U2.1 1987.5,4032.5 v1(2002,4018) ; P2.6 7066.34,2726.34 U3.40
  Bottom Layer w10: v1(2002,4018) 2021.79,3998.21 2939.79,3998.21 2972,3966 2972,3582 3945,2609 4450.3,2609 4721.16,2338.14 6491.86,2338.14 P2.6
VBUS_SENSE: R3.1 R9.2 U2.16 | length 2063.6
  Top Layer w10: v1(1953,4213) 1953,4246.5 1987.5,4281 U2.16
  Bottom Layer w10: v1(1953,4213) 2143,4023 2233,4023 2317,4107 2981.82,4107 R9.2 3257,3831.82 3257,3798 3280,3775 R3.1
pads on no net: J1.1 J1.2 J1.3 J1.4 J1.A8 J1.B8 J2.1 J2.2 J2.3 J2.4 J2.A8 J2.B8 P1.1 U2.6 U2.7 U2.14

## Silkscreen, mask and mechanical layers (free items; w line width, h text height)
Top Overlay:
  text "Control Board" at 3525,5630 h220
  text "USB 2" at 1870,5095 h60
  text "MOTOR 1" at 7115,4785 h60
  text "RESET BUTTON" at 5260,4775 h60
  text "ESP32" at 6935,4115 h60
  text "+5V POWER" at 4245,3895 h60
  text "USB 1" at 1900,3340 h60
  text "BOOT BUTTON" at 5250,3315 h60
  text "MOTOR 2" at 7085,3255 h60
  text "MOTOR POWER" at 4040,2650 h60